# Altium PCB WeeMouse.PcbDoc
Units mm, origin at the board's own origin, x right, y up, seen from the top; angles counter-clockwise.
Board outline 15.6 x 17.3 mm, 2 copper layers (Top Layer, Bottom Layer), stack 1.671 mm thick; 5 components, 13 nets, 28 pads, 26 vias.
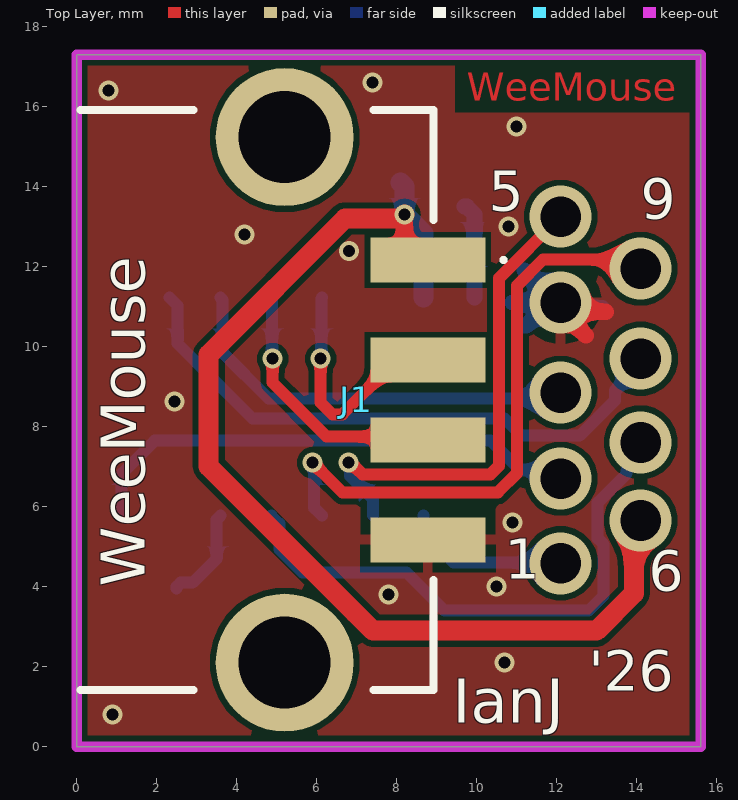
[diagram p0: Top Layer view]
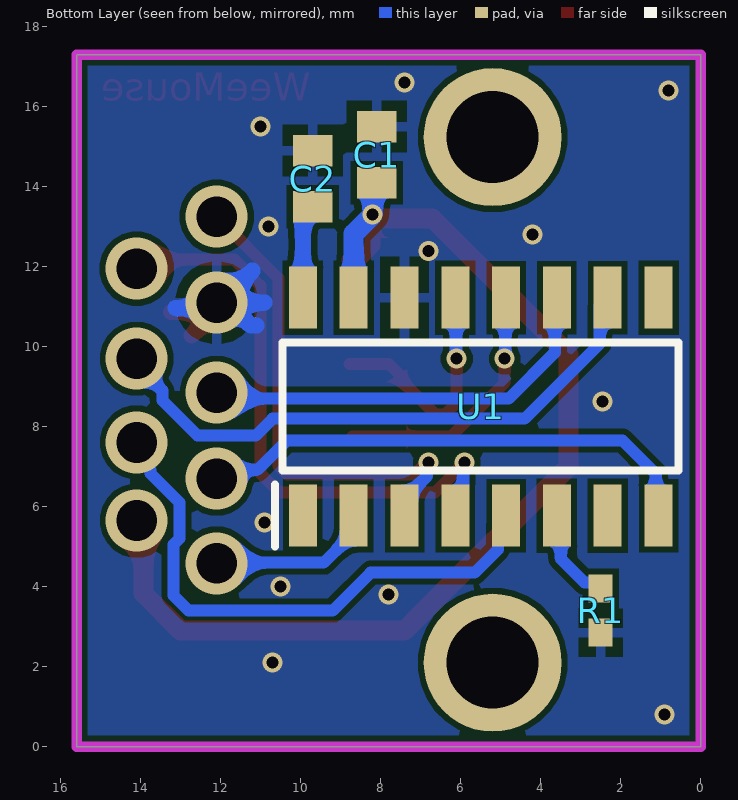
[diagram p1: Bottom Layer view, seen from below]
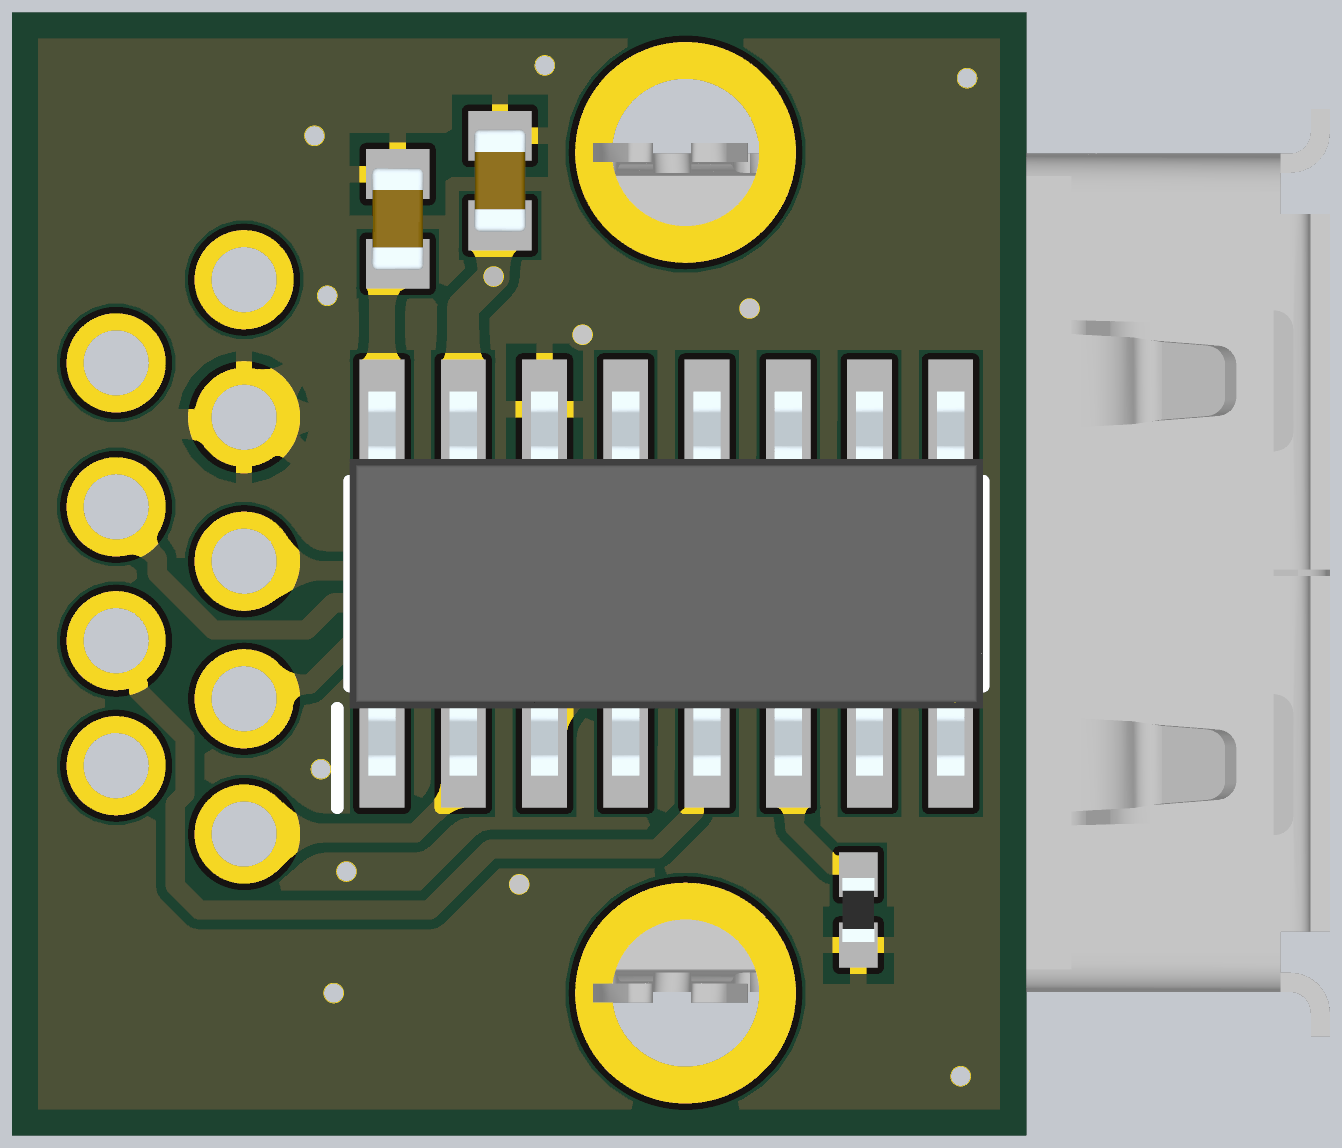
[diagram p2: 3D render of the assembled board from below, using the file's embedded part models]

## Layer stack, top to bottom
Top Solder: solder mask 0.0102, Solder Resist, Dk 3.5
Top Layer: signal copper 0.0356
Dielectric 1: dielectric 0.2, FR-4, Dk 4.8
Dielectric 2: core 1.2, PP-006, Dk 4.1
Dielectric2: dielectric 0.2, FR-4, Dk 4.8
Bottom Layer: signal copper 0.0356
Bottom Solder: solder mask 0.0102, Solder Resist, Dk 3.5

## Board outline
0,0 0,17.3 15.6,17.3 15.6,0

## Design rules (kind name [scope] priority, off if disabled: settings)
Clearance [All] p1: gap=0.15 ignorepadtopadclearanceinfootprint=FALSE
HoleSize [All] p1: absolutevalues=TRUE maxlimit=5 minlimit=0.025 maxpercent=80.000 minpercent=20.000
MinimumSolderMaskSliver [All] p1: minsoldermaskwidth=0.05
PolygonConnect [All] p1: connectstyle=Relief reliefconductorwidth=0.254 reliefentries=4 polygonreliefangle="90 Angle" airgapwidth=0.254
RoutingVias [All] p1: holewidth=0.711 width=1.27 viastyle="Through Hole" minholewidth=0.711 minwidth=1.27 maxholewidth=0.711 maxwidth=1.27
SilkToSolderMaskClearance [IsPad] p1 off: minsilkscreentomaskgap=0.254 clearancetoexposedcopper=TRUE
SolderMaskExpansion [All] p1: expansion=0.102 istentingtop=FALSE
SupplyNets "Schematic Supply Nets_1" [InNet('GND')] p1: voltage=0.000
SupplyNets "Schematic Supply Nets" [InNet('VCC')] p2: voltage=0.000
Width [All] p1: maxlimit=0.5 minlimit=0.254 preferedwidth=0.254 minimp=50.000000 maximp=50.000000 favimp=50.000000
27 further rules are at their usual default settings.

## Components (designator, comment, footprint, x,y, rotation, side; value= is the part's Value field where it differs from the comment)
C1 "100nF 0603" CAPC1608X90N 8.1,14.8 r90 bottom
C2 "100nF 0603" CAPC1608X90N 9.7,14.2 r270 bottom
J1 "87583-2010BLF" 875832010BLF 1.92,8.67 r270 top locked
R1 "0402 1K" RESC1005X40N 2.5,3.4 r90 bottom
U1 "CH544G SOIC16" SOIC127P600X175-16N 5.5,8.5 r90 bottom locked

## Footprints (in the part's own frame and the unit in brackets; to place one, negate y for a bottom-side part, rotate by r counter-clockwise, add the part's x,y. Pads: shape width x height; smd on the part's side, far side on the other; paste and mask are expansions set on the pad)
875832010BLF [mm]
  rect 1.12x2.88 smd: 1(-3.5,6.86) 2(-1,6.86) 3(1,6.86) 4(3.5,6.86)
  round 3.45 hole 2.3: MH1(-6.57,3.28) MH2(6.57,3.28)
  silkscreen extent -7.25,-1.82 7.25,8.8, body extent -7.25,-6.79 7.25,8.09, height 7.49
CAPC1608X90N [mm]
  rect 0.78x0.99 smd: 1(-0.7,0) 2(0.7,0)
  body extent -0.8,-0.41 0.8,0.41, height 0.9
RESC1005X40N [mm]
  rect 0.7x0.6 smd: 1(-0.55,0) 2(0.55,0)
  body extent -0.5,-0.25 0.5,0.25, height 0.4
SOIC127P600X175-16N [mm]
  rect 1.55x0.7 smd: 1(-2.725,4.445) 2(-2.725,3.175) 3(-2.725,1.905) 4(-2.725,0.635) 5(-2.725,-0.635) 6(-2.725,-1.905) 7(-2.725,-3.175) 8(-2.725,-4.445) 9(2.725,-4.445) 10(2.725,-3.175) 11(2.725,-1.905) 12(2.725,-0.635) 13(2.725,0.635) 14(2.725,1.905) 15(2.725,3.175) 16(2.725,4.445)
  silkscreen extent -3.5,-4.95 1.6,5.15, body extent -3,-4.95 3,4.95, height 1.75

## Part data
C1 C2: library part 06033C104KAT4A, "Capacitor", Manufacturer_Name=AVX, Mouser Part Number=581-06033C104KAT4A, Arrow Part Number=06033C104KAT4A, Arrow Price/Stock=https://www.arrow.com/en/products/06033c104kat4a/avx?region=nac, Datasheet Link=http://www.mouser.com/catalog/supplier/library/pdf/AVXSurfaceMountCeramic.pdf, Height=0.9mm, Manufacturer_Part_Number=06033C104KAT4A, Mouser Price/Stock=https://www.mouser.co.uk/ProductDetail/AVX/06033C104KAT4A?qs=8C2chATdSPiv3E9zfPZulg%3D%3D
J1: "Connector", Manufacturer_Name="Amphenol Communications Solutions", Arrow Part Number=87583-2010BLF, Arrow Price/Stock=https://www.arrow.com/en/products/87583-2010blf/amphenol-fci?region=europe, Datasheet Link=https://cdn.amphenol-cs.com/media/wysiwyg/files/drawing/87583.pdf, Height=7.94mm, Manufacturer_Part_Number=87583-2010BLF
R1: library part CRCW04021K00JNED, "Resistor", LCSC Part #=C279981, Manufacturer_Name=Vishay, Mouser Part Number=71-CRCW0402J-1.0K-E3, Arrow Part Number=CRCW04021K00JNED, Arrow Price/Stock=https://www.arrow.com/en/products/crcw04021k00jned/vishay, Datasheet Link=http://www.vishay.com/docs/20035/dcrcwe3.pdf, Height=0.4mm, Manufacturer_Part_Number=CRCW04021K00JNED, Mouser Price/Stock=https://www.mouser.co.uk/ProductDetail/Vishay-Dale/CRCW04021K00JNED?qs=YX%252BK5oaHNYpGRsHVuzxl1A%3D%3D
U1: library part CH544G, "8051 MCU with USB host", Manufacturer_Name=onsemi, Manufacturer_Part_Number=MM74HC4049M

## Via types
v1: diameter 0.5, hole 0.3, Top Layer to Bottom Layer, tented both sides, 17 vias
v2: diameter 1.55, hole 1.02, Top Layer to Bottom Layer, 9 vias

## Nets (pads, with @x,y where several pads share a name; then routed paths per layer and width w, separated by ;. In a path a pad name is that pad's centre, name@x,y a point inside that pad or via, vN(x,y) a via of type N, cw(c..) or ccw(c..) an arc to the next point about the centre after c; other vN are vias at no path point)
ButL: U1.8 | length 12.8
  Bottom Layer w0.3: U1.8 1.124,5.844 1.124,6.824 1.95,7.65 10.35,7.65 11.076,6.924 11.858,6.924 v2@12.082,6.7
  other v2: 12.1,6.7
ButM: U1.11 | length 10.4
  Bottom Layer w0.3: U1.11 3.646,11.174 3.646,9.854 4.8,8.7 11.994,8.7 v2@12.144,8.85
  other v2: 12.1,8.85
ButR: U1.10 | length 14.8
  Bottom Layer w0.3: U1.10 2.525,11.025 2.525,10.075 4.4,8.2 10.7,8.2 11.125,7.775 12.575,7.775 13.458,8.658 13.458,8.899 14.1,9.541 v2(14.1,9.7)
GND: C1.2 C2.1 J1.4 R1.1 U1.14 | length 6.5
  Top Layer w0.4: 12.732,10.277 12.1,10.908 v2(12.1,11.1) 12.32,10.88 13.22,10.88 13.236,10.864
  Bottom Layer w0.4: 10.9,11.1 v2@11.821,11.1 ; 11.1,10.525 11.246,10.525 v2@11.821,11.1 ; 11.2,11.9 v2@12,11.1 ; v2@11.9,11.1 v2@11.821,11.1 ; v2(12.1,11.1) 12.235,10.965 13.129,10.965
  other v1: 0.9,0.8 10.7,2.1 7.8,3.8 10.5,4 10.9,5.6 2.45,8.633 6.81,12.39 4.2,12.8 10.8,13 11,15.5 0.8,16.4 7.4,16.6
Reset: R1.2 U1.6 | length 2.5
  Bottom Layer w0.3: R1.2 2.5,4 2.6,4.1 2.9,4.1 3.498,4.698 3.498,5.678 U1.6
UDM: J1.2 U1.13 | length 6
  Top Layer w0.3: v1(6.1,9.7) 6.1,8.6 6.391,8.309 6.639,8.309 7.49,9.16 7.49,9.26 7.8,9.57 J1.2@8.78,9.57
  Bottom Layer w0.3: v1(6.1,9.7) 6.118,9.718 6.118,11.208 U1.13
UDP: J1.3 U1.12 | length 6.6
  Top Layer w0.3: v1(4.9,9.7) 4.9,9.1 6.25,7.75 8.7,7.75 J1.3
  Bottom Layer w0.3: U1.12 4.882,11.208 4.882,9.718 v1(4.9,9.7)
V33: C2.2 U1.16 | length 2.4
  Bottom Layer w0.4: C2.2 9.755,13.5 9.945,13.31 U1.16
VCC: C1.1 J1.1 U1.15 | length 28.4
  Top Layer w0.4: v1(8.2,13.3) 8.2,12.53 8.56,12.17 J1.1
  Top Layer w0.5: v1(8.2,13.3) 8.107,13.207 6.707,13.207 3.3,9.8 3.3,7.005 6.959,3.346 7.405,2.9 13,2.9 13.929,3.829 13.929,5.483 v2(14.1,5.654)
  Bottom Layer w0.5: C1.1 8.2,14 v1(8.2,13.3) 8.675,12.825 U1.15
X1: U1.3 | length 12.4
  Top Layer w0.3: v1(6.8,7.1) 6.854,7.1 7.144,6.81 10.344,6.81 10.557,7.023 10.557,11.713 12.093,13.25 v2(12.1,13.25)
  Bottom Layer w0.3: v1(6.8,7.1) 6.838,7.062 6.838,6.767 7.405,6.2 U1.3
X2: U1.2 | length 4.2
  Bottom Layer w0.3: U1.2 8.675,5.35 9.425,4.6 12.167,4.6 v2@12.182,4.585
  other v2: 12.1,4.585
Y1: U1.4 | length 15.2
  Top Layer w0.3: v1(5.9,7.1) 6.64,6.36 10.531,6.36 11.007,6.836 11.007,11.527 11.655,12.175 13.875,12.175 v2(14.1,11.95)
  Bottom Layer w0.3: v1(5.9,7.1) 5.938,7.062 5.938,5.972 U1.4
Y2: U1.5 | length 14.2
  Bottom Layer w0.3: U1.5 5.065,5.575 5.065,4.935 5.65,4.35 8.25,4.35 9.2,3.4 12.8,3.4 13.175,3.775 13.175,5.059 13.025,5.209 13.025,6.099 13.75,6.825 13.75,6.92 14.1,7.269 v2(14.1,7.607)
pads on no net: J1.MH1 J1.MH2 U1.1 U1.7 U1.9

## Polygon pours and split planes (outlines as drawn)
GND on Bottom Layer "NONET_L-01_P-001" (solid, remove dead copper, pour order 1): 0.189,0 15.6,0 15.6,17.2 0.137,17.2
GND on Top Layer "NONET_L-01_P-001" (solid, remove dead copper, pour order 0): 0.189,0 15.6,0 15.6,17.2 0.137,17.2

## Keep-outs
Keep-Out Layer:
  the board outline again, w0.254

## Other copper
Top Layer:
  text "WeeMouse" at 9.75,16.15 h0.7

## Silkscreen, mask and mechanical layers (free items; w line width, h text height)
Top Overlay:
  text "5" at 10.3,13.4 h1
  text "9" at 14.1,13.2 h1
  text "1" at 10.7,4.2 h1
  text "WeeMouse" at 1.7,4 h1.1 r90
  text "6" at 14.3,3.9 h1
  text "'26" at 12.8,1.4 h1
  text "IanJ" at 9.4,0.6 h1.1
Board Shape:
  the board outline again, w0.254